# Altium PCB EM-Lite.PcbDoc
Units mm, origin at the board's own origin, x right, y up, seen from the top; angles counter-clockwise.
Board outline 39 x 34 mm, 2 copper layers (Top Layer, Bottom Layer); 4 components, 0 nets, 60 pads, 21 vias.
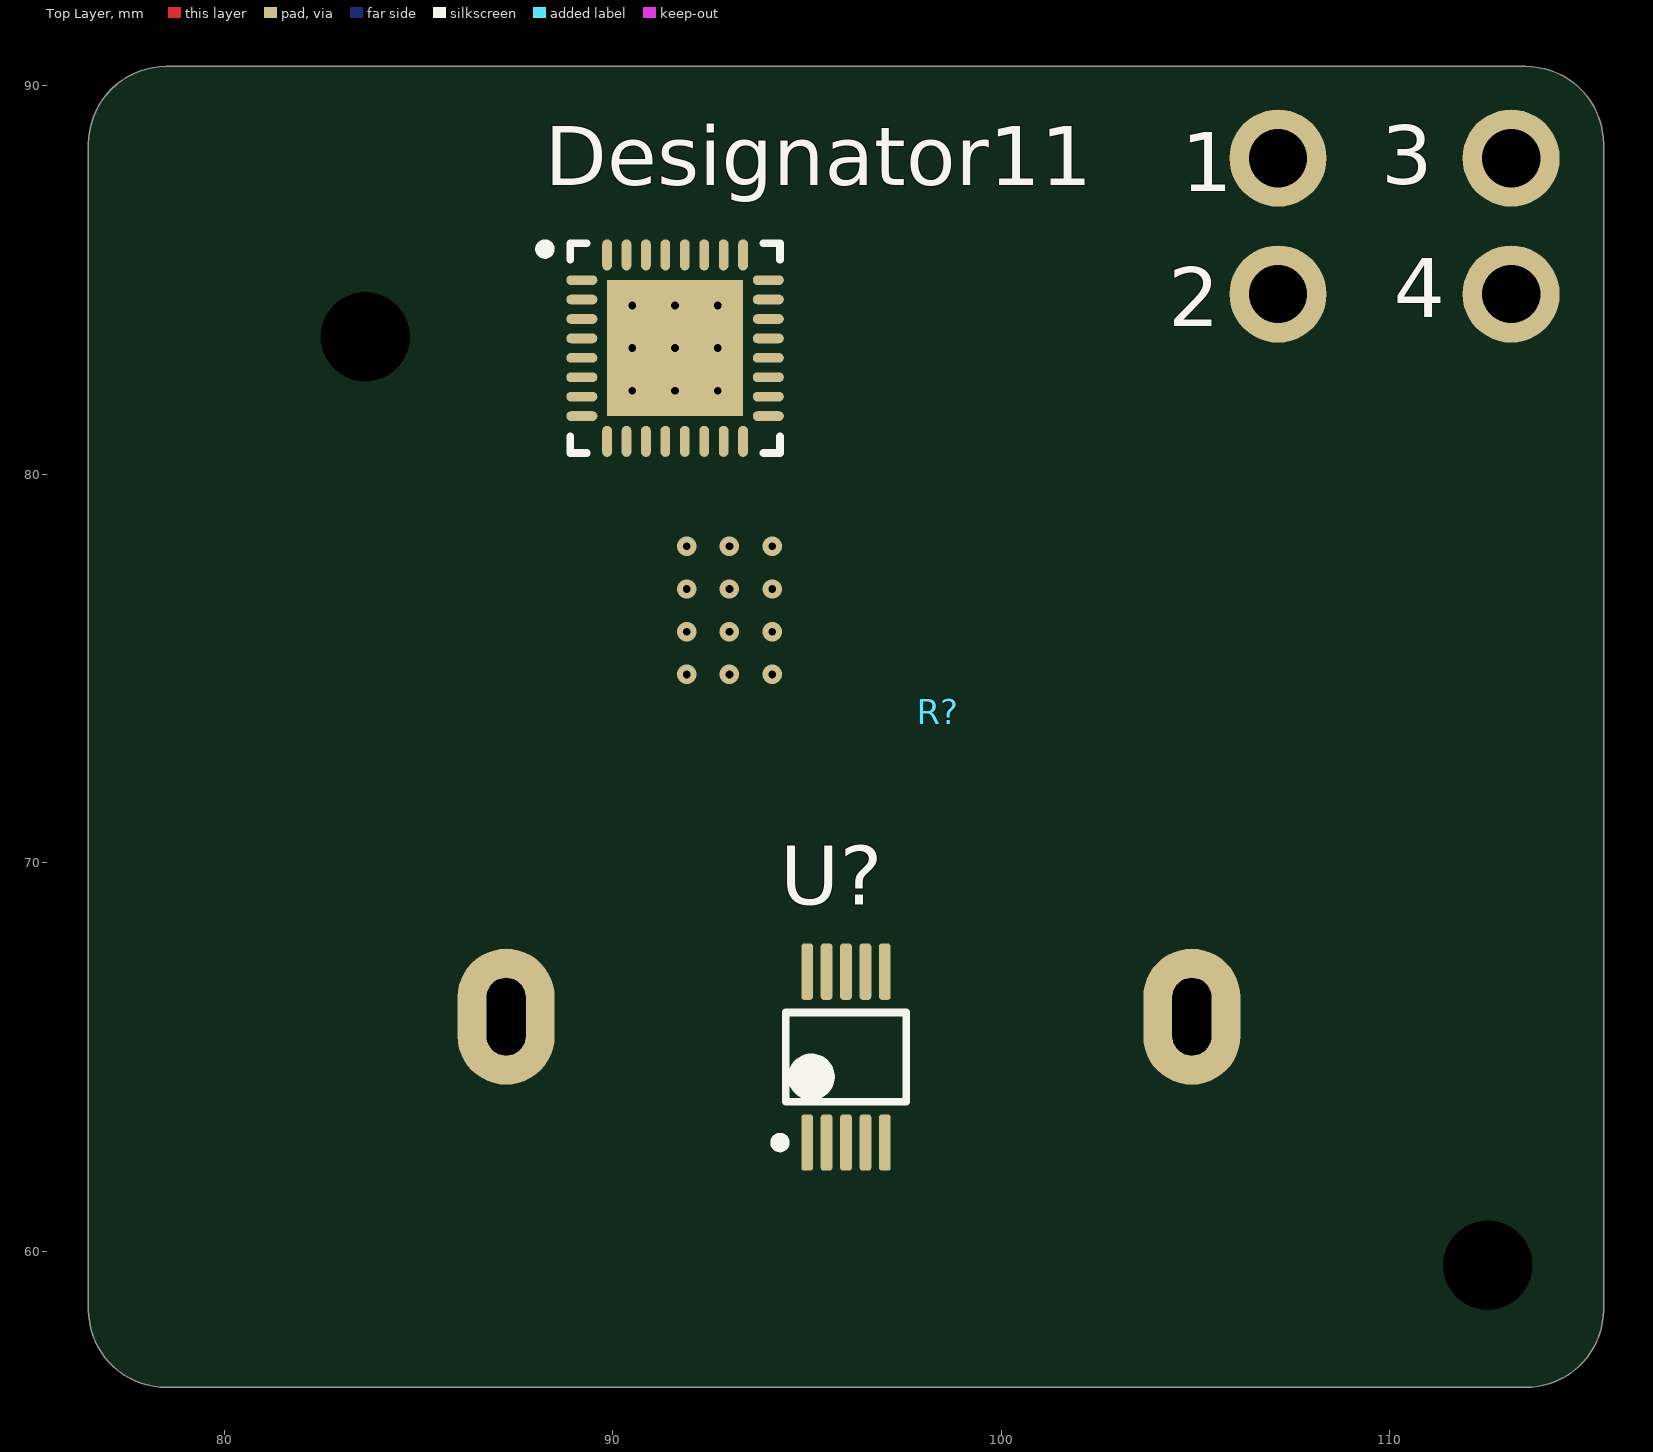
[diagram p0: Top Layer view]
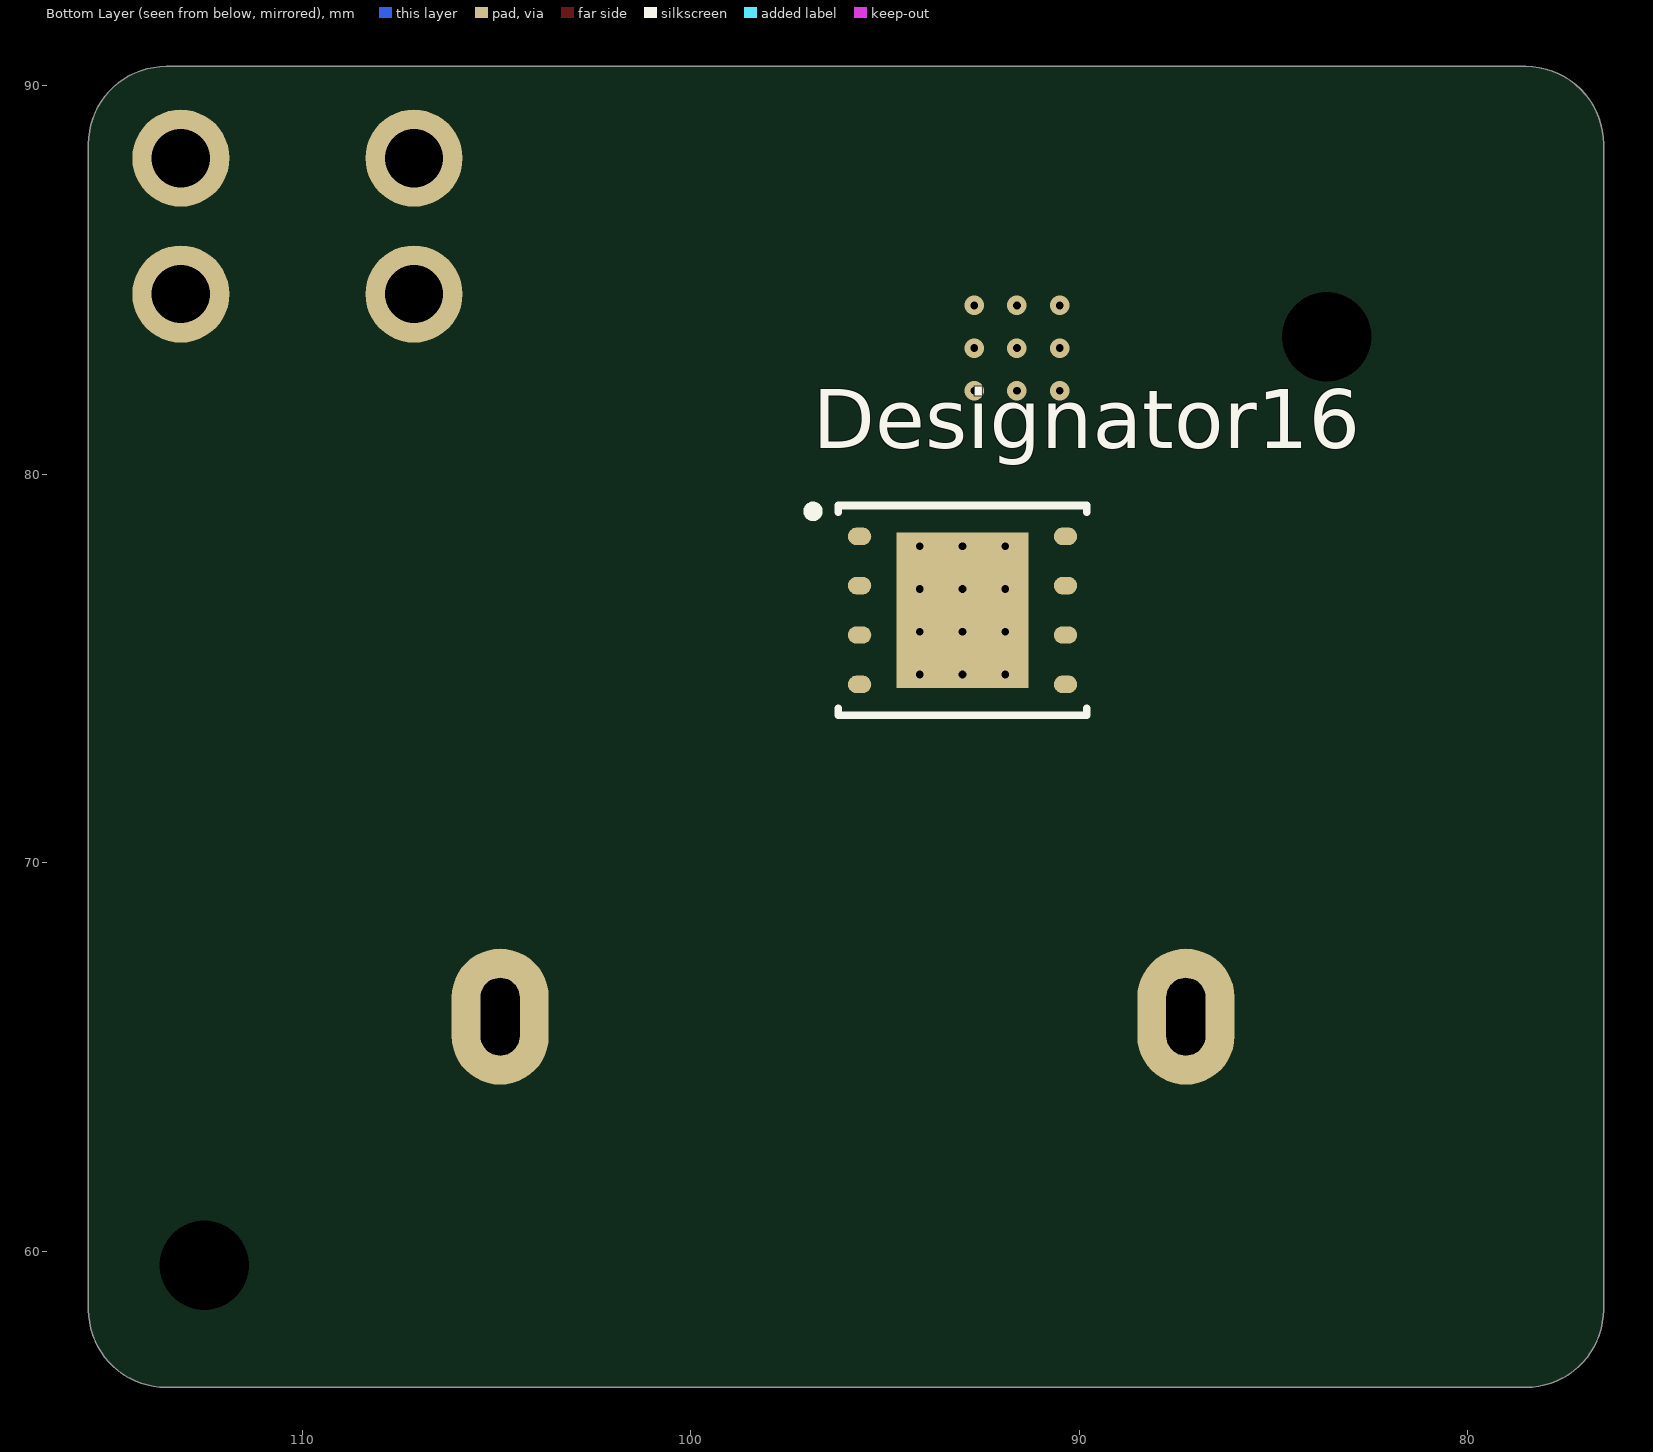
[diagram p1: Bottom Layer view, seen from below]

## Layer stack, top to bottom
Top Solder: solder mask 0.0102, Solder Resist, Dk 3.5
Top Layer: signal copper 0.0356
Dielectric 1: dielectric 0.32, FR-4, Dk 4.8
Bottom Layer: signal copper 0.0356
Bottom Solder: solder mask 0.0102, Solder Resist, Dk 3.5

## Board outline
76.5,58.5 ccw(c78.5,58.5) 78.5,56.5 81,56.5 112,56.5 113.5,56.5 ccw(c113.5,58.5) 115.5,58.5 115.5,85.5 115.5,88.5 ccw(c113.5,88.5) 113.5,90.5 78.5,90.5 ccw(c78.5,88.5) 76.5,88.5

## Design rules (kind name [scope] priority, off if disabled: settings)
Clearance [All] p1: gap=0.254 ignorepadtopadclearanceinfootprint=FALSE except(0: Arc-Hole Track-Hole SMDPad-Hole THPad-Hole Via-Hole Fill-Hole Poly-Hole Region-Hole Text-Hole)
PolygonConnect [All] p1: connectstyle=Relief reliefconductorwidth=0.254 reliefentries=4 polygonreliefangle="90 Angle" airgapwidth=0.254
RoutingVias [All] p1: holewidth=0.711 width=1.27 viastyle="Through Hole" minholewidth=0.711 minwidth=1.27 maxholewidth=0.711 maxwidth=1.27
SolderMaskExpansion [All] p1: expansion=0.102 istentingtop=FALSE
Width [All] p1: maxlimit=0.254 minlimit=0.254 preferedwidth=0.254
30 further rules are at their usual default settings.

## Classes and differential pairs
component class EM-Lite: U?

## Components (designator, comment, footprint, x,y, rotation, side; value= is the part's Value field where it differs from the comment)
Designator11 "Comment" STM-UFQFPN32_L 91.6,83.25 r0 top
Designator16 "Comment" ADST-MA1-8_L 93,76.5 r180 bottom
R? "500mR WSBM Shunt" 500mR 76.022,56.04 r0 top
U? "INA229-Q1" VSSOP10 96,65 r90 top

## Footprints (in the part's own frame and the unit in brackets; to place one, negate y for a bottom-side part, rotate by r counter-clockwise, add the part's x,y. Pads: shape width x height; smd on the part's side, far side on the other; paste and mask are expansions set on the pad)
500mR [mm]
  round 2.5 hole 1.5: 1(31.1,32.1) 2(31.1,28.6) 3(37.1,32.1) 4(37.1,28.6)
  oval 2.5x3.5 hole 1 slot 2 at 90 deg: 5(11.23,10) 6(28.88,10)
  round 0 hole 2.3 unplated paste-5 mask-5: H1(7.6,27.5) H2(36.5,3.6)
  body extent -22.44,-1.47 62.54,39.03, height 5.04
ADST-MA1-8_L [mm] "UDFN, 8-Leads, Body 5.1x6.1mm, Pitch 1.27mm, Thermal Pad 4x3.4mm, IPC High Density"
  oval 0.6x0.45 smd: 1(-2.65,1.905) 2(-2.65,0.635) 3(-2.65,-0.635) 4(-2.65,-1.905) 5(2.65,-1.905) 6(2.65,-0.635) 7(2.65,0.635) 8(2.65,1.905)
  rect 3.4x4 smd: 9(0,0)
  silkscreen extent -3.98,-2.7 3.2,2.7, body extent -3.05,-2.55 3.05,2.55, height 0.6
STM-UFQFPN32_L [mm] "QFN, 32-Leads, Body 5.1x5.1mm, Pitch 0.5mm, Thermal Pad 3.5x3.5mm, IPC High Density"
  oval 0.8x0.25 smd: 1(-2.4,1.75) 2(-2.4,1.25) 3(-2.4,0.75) 4(-2.4,0.25) 5(-2.4,-0.25) 6(-2.4,-0.75) 7(-2.4,-1.25) 8(-2.4,-1.75) 17(2.4,-1.75) 18(2.4,-1.25) 19(2.4,-0.75) 20(2.4,-0.25) 21(2.4,0.25) 22(2.4,0.75) 23(2.4,1.25) 24(2.4,1.75)
  oval 0.25x0.8 smd: 9(-1.75,-2.4) 10(-1.25,-2.4) 11(-0.75,-2.4) 12(-0.25,-2.4) 13(0.25,-2.4) 14(0.75,-2.4) 15(1.25,-2.4) 16(1.75,-2.4) 25(1.75,2.4) 26(1.25,2.4) 27(0.75,2.4) 28(0.25,2.4) 29(-0.25,2.4) 30(-0.75,2.4) 31(-1.25,2.4) 32(-1.75,2.4)
  rect 3.5x3.5 smd: 33(0,0)
  silkscreen extent -3.47,-2.7 2.7,2.7, body extent -2.55,-2.55 2.55,2.55, height 0.6
VSSOP10 [mm] "VSSOP, 10-Leads, Body 3.00x3.00mm, Pitch 0.50mm"
  rrect50% 1.45x0.3 smd: 1(-2.2,1) 2(-2.2,0.5) 3(-2.2,0) 4(-2.2,-0.5) 5(-2.2,-1) 6(2.2,-1) 7(2.2,-0.5) 8(2.2,0) 9(2.2,0.5) 10(2.2,1)
  silkscreen extent -2.32,-1.55 1.15,1.82, body extent -2.45,-1.55 2.45,1.55, height 1.1

## Part data
R?: library part Shunt_500mR, "Power Metal Strip® Battery Shunt Resistor W/Molded Enclosure / Very Low Value (50 μR, 100 μR, 125 μR, and 500 μR)", Manufacturer=Vishay, Manufacturer Part Number=WSBM8518L5000
U?: library part INA229, "85-V, 20-Bit, Ultra-Precise Power/Energy/Charge Monitor With SPI Interface", Manufacturer="Texas Instruments", Manufacturer Part Number=INA229AQDGSRQ1

## Via types
v1: diameter 0.5, hole 0.2, Top Layer to Bottom Layer, 21 vias

## Nets (pads, with @x,y where several pads share a name; then routed paths per layer and width w, separated by ;. In a path a pad name is that pad's centre, name@x,y a point inside that pad or via, vN(x,y) a via of type N, cw(c..) or ccw(c..) an arc to the next point about the centre after c; other vN are vias at no path point)
pads on no net: Designator11.1 Designator11.2 Designator11.3 Designator11.4 Designator11.5 Designator11.6 Designator11.7 Designator11.8 Designator11.9 Designator11.10 Designator11.11 Designator11.12 Designator11.13 Designator11.14 Designator11.15 Designator11.16 Designator11.17 Designator11.18 Designator11.19 Designator11.20 Designator11.21 Designator11.22 Designator11.23 Designator11.24 Designator11.25 Designator11.26 Designator11.27 Designator11.28 Designator11.29 Designator11.30 Designator11.31 Designator11.32 Designator11.33 Designator16.1 Designator16.2 Designator16.3 Designator16.4 Designator16.5 Designator16.6 Designator16.7 Designator16.8 Designator16.9 R?.1 R?.2 R?.3 R?.4 R?.5 R?.6 R?.H1 R?.H2 U?.1 U?.2 U?.3 U?.4 U?.5 U?.6 U?.7 U?.8 U?.9 U?.10
copper on no net:
  other v1: 91.9,74.85 93,74.85 94.1,74.85 91.9,75.95 93,75.95 94.1,75.95 91.9,77.05 93,77.05 94.1,77.05 91.9,78.15 93,78.15 94.1,78.15 90.5,82.15 91.6,82.15 92.7,82.15 90.5,83.25 91.6,83.25 92.7,83.25 90.5,84.35 91.6,84.35 92.7,84.35

## Text inside footprints (layer, text, board x,y; h text height)
R?: Top Overlay "1" at 104.626,87.294 h1.52; Top Overlay "2" at 104.301,83.819 h1.52; Top Overlay "3" at 109.776,87.469 h1.52; Top Overlay "4" at 110.101,84.044 h1.52; Mechanical 1 "500mR" at 92.401,69.719 h1.52